# Allegro board SMART_THROTTLE.brd
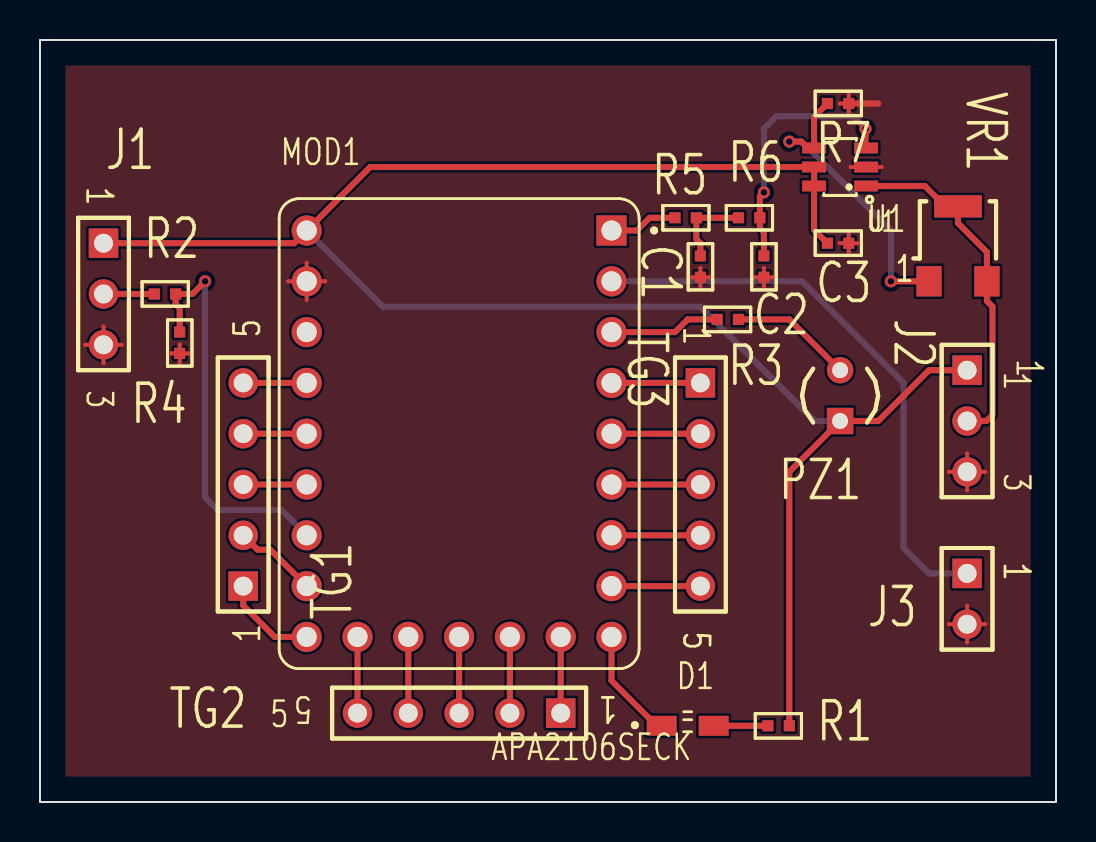
[diagram p0: board, top side]
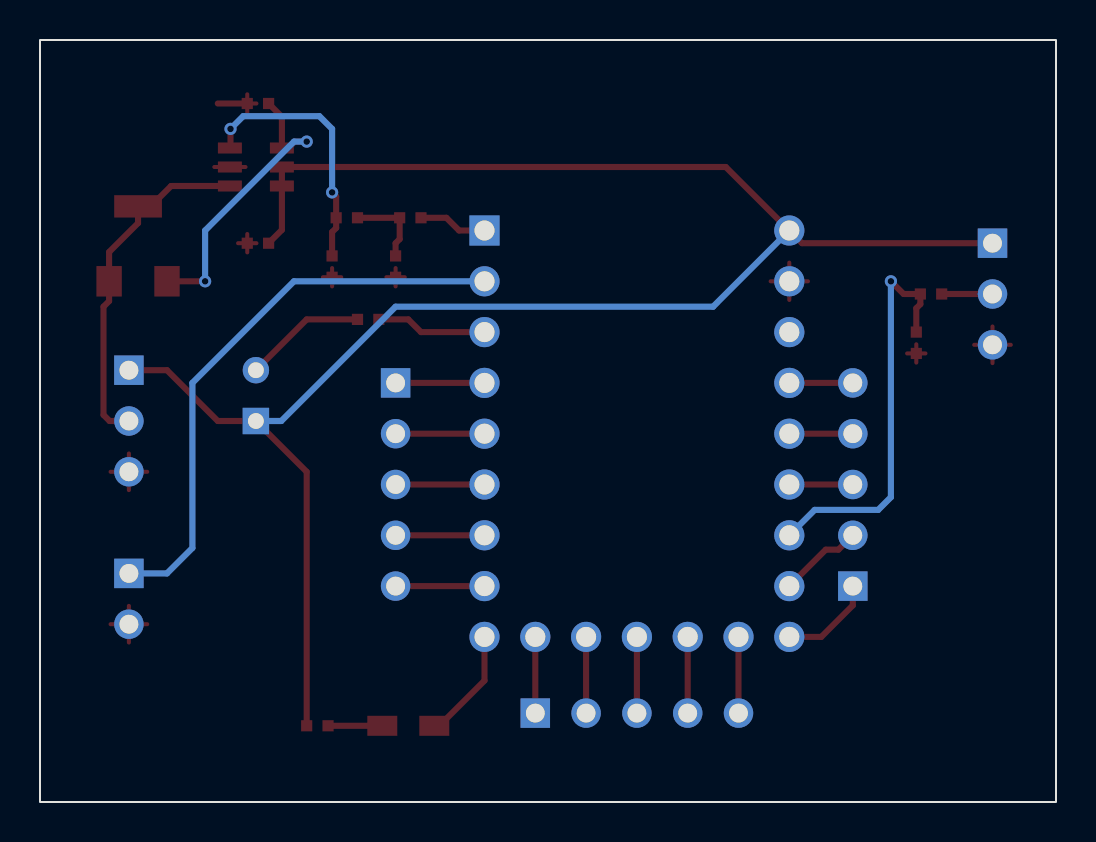
[diagram p1: board, bottom side, seen from below]

Outline 50.8 x 38.1 mm; copper layers: TOP, BOTTOM. Coordinates in mm from the lower left corner of the outline.
Outline path: rectangle 0,0 50.8,38.1

## Design rules (mm)
constraint set DEFAULT: min track width 0.203

## Placement (name value [footprint] x y rotation side)
C1  0.1  [SMC0402]  33.02 27.31 270 top
C2  0.1  [SMC0402]  36.2 27.31 270 top
C3  0.1  [SMC0402]  39.37 27.94 0 top
D1  APA2106SECK  [LED_APA2106SECK]  32.38 3.81 0 top
J1  SMP-03V-BC  [BLKCON100VHTM1SQW1003]  3.17 27.94 270 top
J2  SMR-03V-B  [BLKCON100VHTM1SQW1003]  46.36 21.59 270 top
J3  SMP-02V-BC  [BLKCON100VHTM1SQW1002]  46.36 11.43 270 top
MOD1  RP2040-ZERO  [MODULE_RP2040-ZERO]  20.95 18.42 0 top
NOREF  -  []  0 38.74 0 top
NOREF#2  -  []  -0.64 0 90 top
PZ1  AB2063B-2-LW50  [CYLD150LS100031]  40 19.05 90 top
R1  10 K  [SMR0402]  37.47 3.81 180 top
R2  10 K  [SMR0402]  5.71 25.4 0 top
R3  10 K  [SMR0402]  34.92 24.13 180 top
R4  30 K  [SMR0402]  6.98 23.5 270 top
R5  318 K  [SMR0402]  31.75 29.21 0 top
R6  318 K  [SMR0402]  34.92 29.21 0 top
R7  10 K  [SMR0402]  39.37 34.93 0 top
TG1  Tespoint_Group  [BLKCON100VHTM1SQW1005]  10.16 10.8 90 top
TG2  Tespoint_Group  [BLKCON100VHTM1SQW1005]  26.04 4.45 180 top
TG3  Tespoint_Group  [BLKCON100VHTM1SQW1005]  33.02 20.96 270 top
U1  TPH2503-TR  [SOT23-6]  40 31.75 90 top
VR1  TC33X-2-502E  [VRES36]  44.45 26.04 0 top

## Library data of the parts
C1-C3 = CAP_NP
D1 = APA2106SECK
J1 J2 = CON3
J3 = CON2
MOD1 = RP2040-ZERO
PZ1 = PIEZO BUZZER_2
R1-R7 = R
TG1-TG3 = HEADER 5
U1 = TPH2503-TR
VR1 = TC33X-2-502E

## Footprints (pads in the part's own frame, mm; a bottom-side part is the same pattern mirrored in y, then rotated)
BLKCON100VHTM1SQW1002
  rect 1.473x1.473 hole 0.94: 1(0,0)
  round 1.473 hole 0.94: 2(2.54,0)
BLKCON100VHTM1SQW1003
  rect 1.473x1.473 hole 0.94: 1(0,0)
  round 1.473 hole 0.94: 2(2.54,0) 3(5.08,0)
BLKCON100VHTM1SQW1005
  rect 1.473x1.473 hole 0.94: 1(0,0)
  round 1.473 hole 0.94: 2(2.54,0) 3(5.08,0) 4(7.62,0) 5(10.16,0)
CYLD150LS100031
  rect 1.321x1.321 hole 0.787: 1(0,0)
  round 1.321 hole 0.787: 2(2.54,0)
LED_APA2106SECK
  rect 1.5x1 smd: 1(-1.3,0) 2(1.3,0)
MODULE_RP2040-ZERO
  rect 1.508x1.508 hole 1: 1(7.62,10.16)
  round 1.508 hole 1: 2(7.62,7.62) 3(7.62,5.08) 4(7.62,2.54) 5(7.62,0) 6(7.62,-2.54) 7(7.62,-5.08) 8(7.62,-7.62) 9(7.62,-10.16) 10(5.08,-10.16) 11(2.54,-10.16) 12(0,-10.16) 13(-2.54,-10.16) 14(-5.08,-10.16) 15(-7.62,-10.16) 16(-7.62,-7.62) 17(-7.62,-5.08) 18(-7.62,-2.54) 19(-7.62,0) 20(-7.62,2.54) 21(-7.62,5.08) 22(-7.62,7.62) 23(-7.62,10.16)
SMC0402
  rect 0.559x0.559 smd: 1(0,0) 2(1.067,0)
SMR0402
  rect 0.559x0.559 smd: 1(0,0) 2(1.067,0)
SOT23-6
  rect 0.55x1.2 smd: 1(-0.95,-1.3) 2(0,-1.3) 3(0.95,-1.3) 4(0.95,1.3) 5(0,1.3) 6(-0.95,1.3)
VRES36
  rect 1.27x1.524 smd: 1(0,0) 3(2.896,0)
  rect 2.388x1.118 smd: 2(1.448,3.747)

## Nets
3V3: MOD1.21
GND_SIGNAL: C1.2 C2.2 C3.2 J1.3 J2.3 J3.2 MOD1.22 R4.2 R7.2 U1.2
VCC: C3.1 J1.1 J2.1 MOD1.23 PZ1.1 R1.1 U1.5(S\H\D\N\) U1.6
ANALOG_THROT_IN: C2.1 R6.2 U1.3
ANALOG_THROT_OUT: J2.2 U1.1 VR1.2(W) VR1.3
BRAKE_N: J3.1 MOD1.2
LED_N: D1.1 MOD1.9
PIEZO: MOD1.3 R3.2
PWM_THROTTLE: MOD1.1 R5.1
SCALED_THROT_IN: MOD1.17 R2.2 R4.1
TP3: MOD1.4 TG3.1
TP4: MOD1.5 TG3.2
TP5: MOD1.6 TG3.3
TP6: MOD1.7 TG3.4
TP7: MOD1.8 TG3.5
TP9: MOD1.10(GP9) TG2.1
TP10: MOD1.11 TG2.2
TP11: MOD1.12 TG2.3
TP12: MOD1.13 TG2.4
TP13: MOD1.14 TG2.5
TP14: MOD1.15 TG1.1
TP15: MOD1.16 TG1.2
TP27: MOD1.18 TG1.3
TP28: MOD1.19 TG1.4
TP29: MOD1.20 TG1.5
N13836: J1.2 R2.1
N14014: C1.1 R5.2 R6.1
N14247: D1.2 R1.2
N14498: R7.1 U1.4 VR1.1
N15427: PZ1.2(-) R3.1

## Via types
v1: diameter 0.61, hole 0.33, TOP to BOTTOM, 5 vias

## Routing (per net, layer and track width the routed paths; a pad name or vN(x,y) marks a point on that pad's centre or on a via; arc(x,y) is an arc through that point)
GND_SIGNAL: length 26.4
  TOP w0.203: 45.44,8.89 J3.2 ; J3.2 47.27,8.89 ; J3.2 46.36,7.98 ; J3.2 46.36,9.8 ; 40.44,27.48 C3.2 ; C3.2 40.44,28.4 ; C3.2 39.98,27.94 ; C3.2 40.89,27.94 ; J1.3 4.09,22.86 ; J1.3 3.17,21.95 ; J1.3 3.17,23.77 ; J1.3 2.26,22.86 ; 6.98,21.97 R4.2 ; R4.2 6.98,22.89 ; R4.2 7.44,22.43 ; R4.2 6.53,22.43 ; 36.2,25.78 C2.2 ; C2.2 35.74,26.24 ; C2.2 36.65,26.24 ; C2.2 36.2,26.7 ; MOD1.22 13.33,26.97 ; MOD1.22 13.33,25.1 ; MOD1.22 14.27,26.04 ; MOD1.22 12.4,26.04 ; 40.53,31.75 U1.2 42.08,31.75 ; J2.3 47.27,16.51 ; J2.3 45.44,16.51 ; J2.3 46.36,17.42 ; J2.3 46.36,15.6 ; 40.44,34.47 R7.2 ; R7.2 40.44,35.38 ; R7.2 39.98,34.93 ; C1.2 33.02,26.7 ; C1.2 33.48,26.24 ; C1.2 33.02,25.78 ; C1.2 32.56,26.24
  TOP w0.305: R7.2 41.91,34.93
VCC: length 95.5
  TOP w0.305: R1.1 37.47,16.51 PZ1.1 41.91,19.05 44.45,21.59 J2.1 ; J1.1 12.7,27.94 MOD1.23 16.51,31.75 U1.5 U1.6 38.71,28.6 C3.1
  BOTTOM w0.305: MOD1.23 17.14,24.77 33.02,24.77 38.73,19.05 PZ1.1
ANALOG_THROT_IN: length 13.1
  TOP w0.305: U1.3 41.27,32.73 v1(41.27,33.66) ; C2.1 36.2,28.5 35.99,28.7 R6.2 35.99,30.28 v1(36.2,30.48)
  BOTTOM w0.305: v1(41.27,33.66) 40.64,34.29 36.83,34.29 36.2,33.65 v1(36.2,30.48)
ANALOG_THROT_OUT: length 17.6
  TOP w0.305: J2.2 47.32,19.05 47.62,19.35 47.62,24.77 47.35,25.04 VR1.3 47.35,27.5 45.9,28.94 VR1.2 45.26,29.78 44.24,30.8 U1.1
BRAKE_N: length 28.7
  BOTTOM w0.305: J3.1 44.45,11.43 43.18,12.7 43.18,20.96 38.1,26.04 MOD1.2
LED_N: length 6
  TOP w0.305: 28.57,8.61 MOD1.9 28.57,6.07 30.84,3.81 D1.1
PIEZO: length 5.5
  TOP w0.305: R3.2 32.38,24.13 31.75,23.5 MOD1.3
PWM_THROTTLE: length 3.4
  TOP w0.305: MOD1.1 29.84,28.58 30.48,29.21 R5.1
SCALED_THROT_IN: length 20.5
  TOP w0.305: v1(8.25,26.04) 7.62,25.4 R2.2 6.78,24.89 6.98,24.69 R4.1
  BOTTOM w0.305: v1(8.25,26.04) 8.25,15.24 8.89,14.61 12.06,14.61 MOD1.17 13.39,13.28
TP3: length 4.9
  TOP w0.305: TG3.1 29.24,20.96 ; 29.24,20.96 MOD1.4 ; 29.24,20.96 29.03,21.16 29.03,21.31
TP4: length 4.4
  TOP w0.305: MOD1.5 TG3.2
TP5: length 4.4
  TOP w0.305: TG3.3 MOD1.6
TP6: length 4.4
  TOP w0.305: MOD1.7 TG3.4
TP7: length 4.4
  TOP w0.305: MOD1.8 TG3.5
TP9: length 4.2
  TOP w0.305: TG2.1 MOD1.10 26.04,8.61
TP10: length 4.2
  TOP w0.305: 23.49,8.61 MOD1.11 TG2.2
TP11: length 4.2
  TOP w0.305: 20.95,8.61 MOD1.12 TG2.3
TP12: length 4.2
  TOP w0.305: TG2.4 MOD1.13 18.41,8.61
TP13: length 4.2
  TOP w0.305: 15.88,8.61 MOD1.14 TG2.5
TP14: length 5
  TOP w0.305: TG1.1 10.16,9.83 11.73,8.26 MOD1.15 13.51,8.26
TP15: length 4.2
  TOP w0.305: MOD1.16 11.51,12.62 10.88,12.62 TG1.2
TP27: length 3.2
  TOP w0.305: MOD1.18 TG1.3
TP28: length 3.2
  TOP w0.305: MOD1.19 TG1.4
TP29: length 3.2
  TOP w0.305: 10.16,20.96 MOD1.20
N13836: length 2.5
  TOP w0.305: J1.2 R2.1
N14014: length 4.1
  TOP w0.305: C1.1 33.02,27.94 32.82,28.14 R5.2 R6.1
N14247: length 2.7
  TOP w0.305: R1.2 D1.2
N14498: length 15.2
  TOP w0.305: v1(37.47,33.02) 38.06,33.02 38.38,32.7 U1.4 38.71,34.26 R7.1 ; VR1.1 v1(42.55,26.04)
  BOTTOM w0.305: v1(42.55,26.04) 42.55,28.58 38.1,33.02 v1(37.47,33.02)
N15427: length 6.1
  TOP w0.305: PZ1.2 37.47,24.13 R3.1

## Copper pours and planes (outline as drawn; the poured copper is in the pictures)
GND_SIGNAL on TOP: 1.27,36.83 49.53,36.83 49.53,1.27 1.27,1.27
